# Altium PCB UIR_imitation.PcbDoc
Units mm, origin at the board's own origin, x right, y up, seen from the top; angles counter-clockwise.
Board outline 64.5 x 30.5 mm, 2 copper layers (Top Layer, Bottom Layer); 35 components, 13 nets, 92 pads, 18 vias.
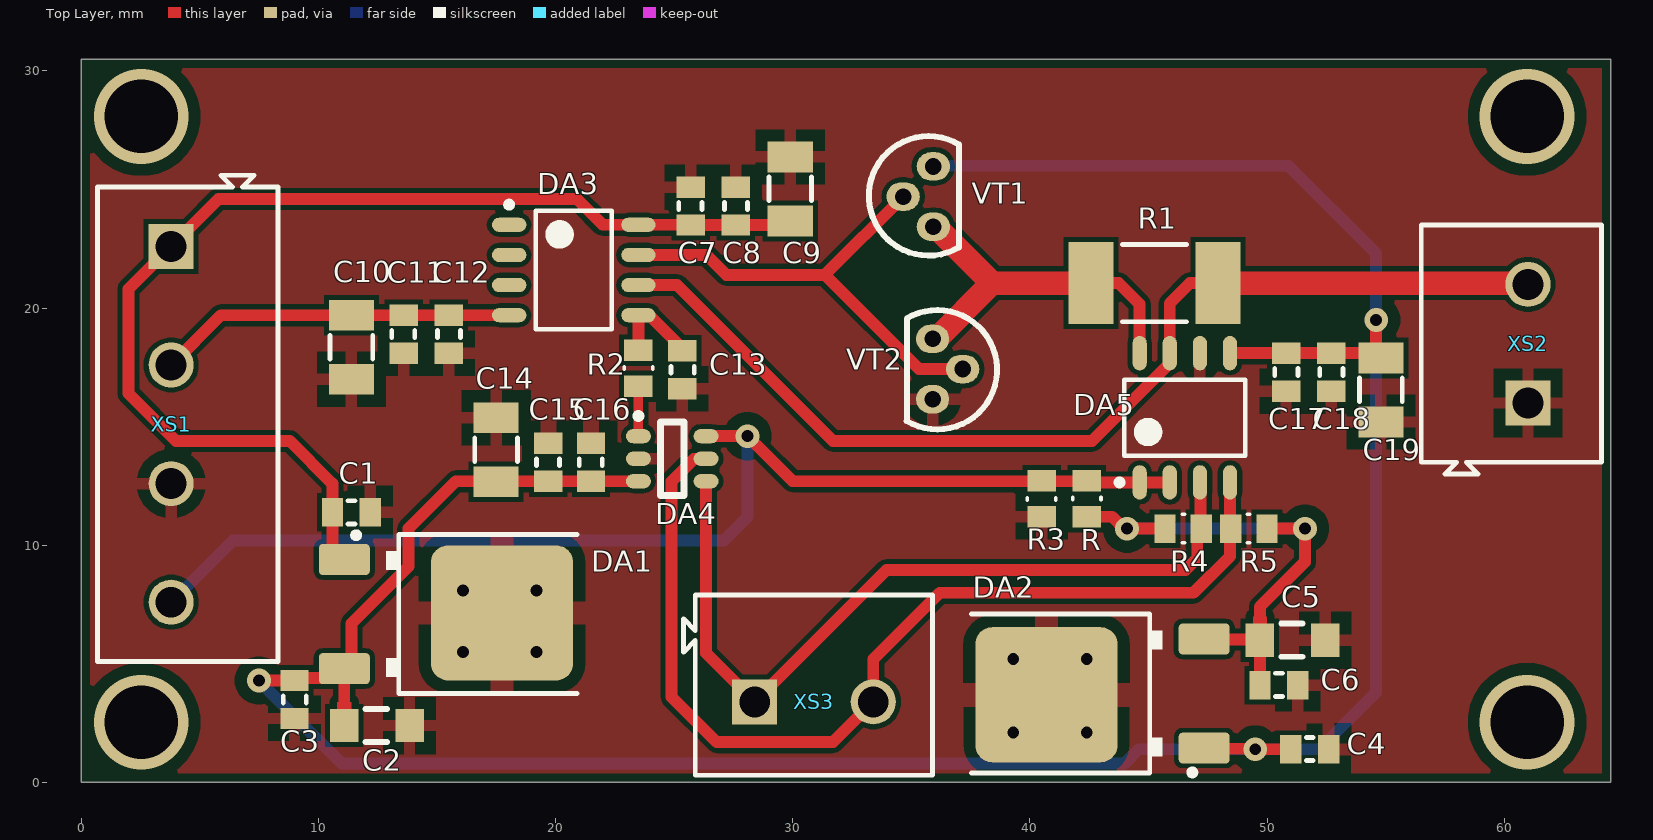
[diagram p0: Top Layer view]
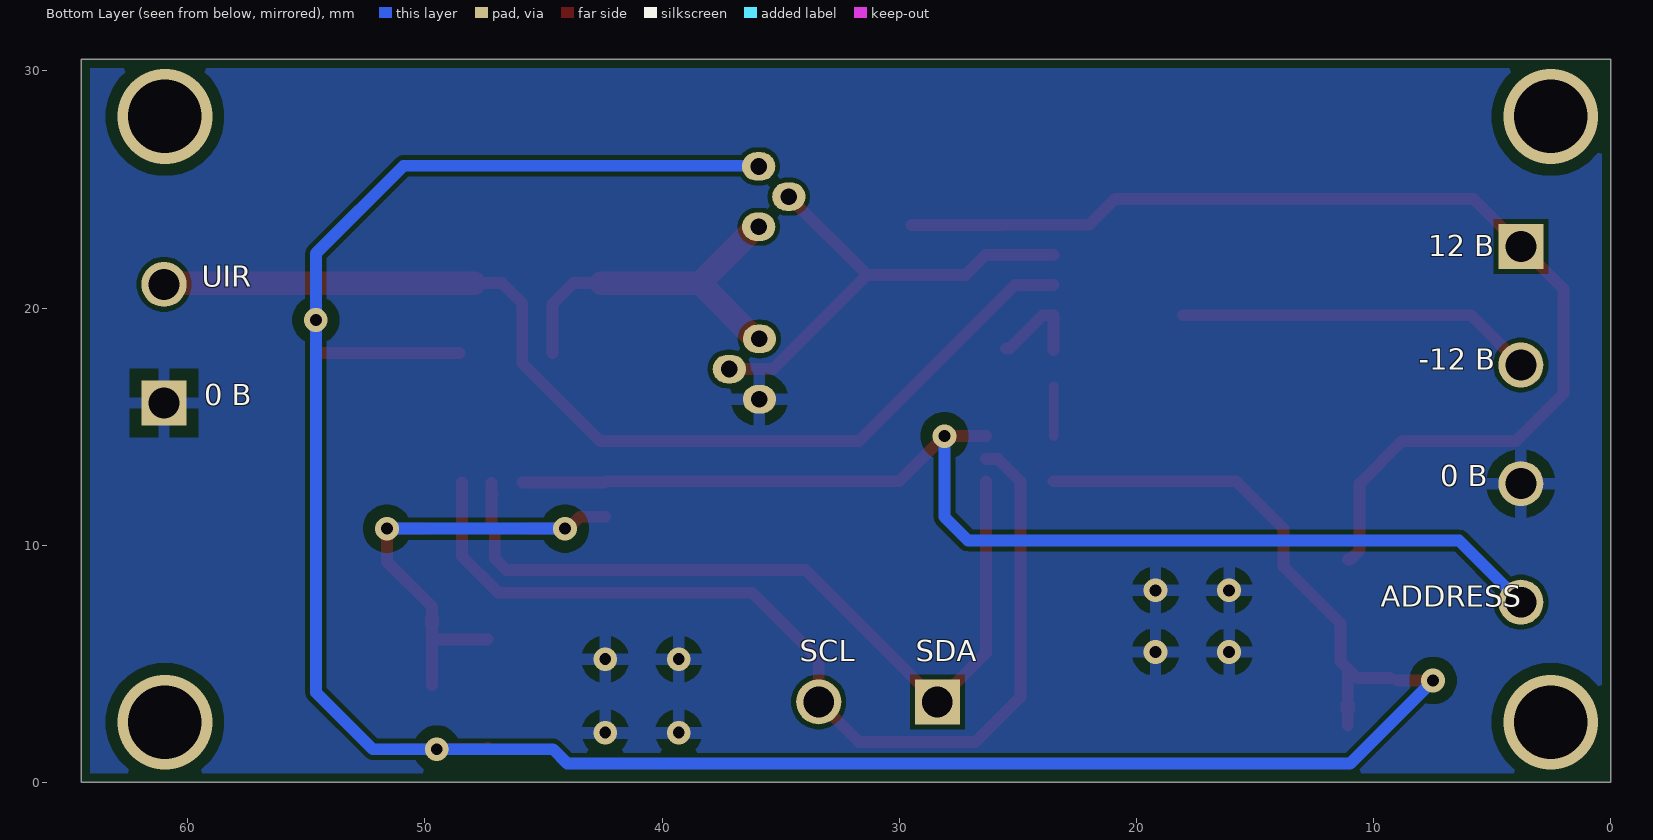
[diagram p1: Bottom Layer view, seen from below]
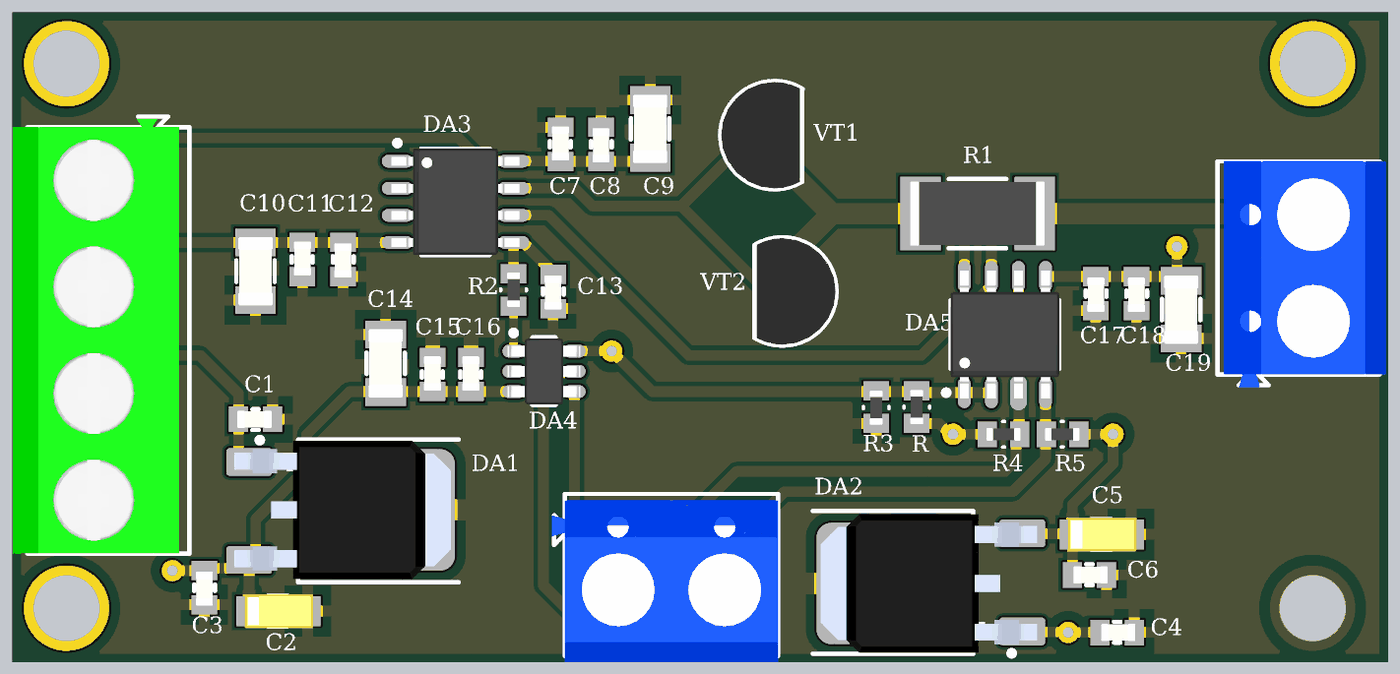
[diagram p2: 3D render of the assembled board from above, using the file's embedded part models]

## Layer stack, top to bottom
Top Solder: solder mask 0.0102, Solder Resist, Dk 3.5
Top Layer: signal copper 0.0356
Dielectric 1: dielectric 0.32, FR-4, Dk 4.8
Bottom Layer: signal copper 0.0356
Bottom Solder: solder mask 0.0102, Solder Resist, Dk 3.5

## Board outline
0,0 64.5,0 64.5,30.5 0,30.5

## Design rules (kind name [scope] priority, off if disabled: settings)
Clearance [All] p1: gap=0.254 ignorepadtopadclearanceinfootprint=FALSE except(0: Arc-SMDPad Arc-THPad Arc-Via Arc-Hole Track-SMDPad Track-THPad Track-Via Track-Hole SMDPad-Via SMDPad-Hole THPad-Hole Via-Hole Fill-Hole Poly-Hole Region-Hole Text-Hole; 0.2: Arc-Fill Arc-Poly Arc-Region Track-Fill Track-Poly Track-Region SMDPad-Fill SMDPad-Poly SMDPad-Region THPad-Fill THPad-Poly THPad-Region; 0.3: Fill-Fill Fill-Poly Fill-Region Poly-Poly Poly-Region Region-Region; 0.508: Via-Fill Via-Poly Via-Region)
Height [All] p1: minheight=0 maxheight=70 prefheight=35
PolygonConnect [All] p1: connectstyle=Relief reliefconductorwidth=0.5 reliefentries=4 polygonreliefangle="90 Angle" airgapwidth=0.5
RoutingVias [All] p1: holewidth=1.2 width=2.5 viastyle="Through Hole" minholewidth=0.5 minwidth=0.8 maxholewidth=3 maxwidth=5
SolderMaskExpansion [All] p1: expansion=0.102 istentingtop=FALSE
SupplyNets "Schematic Supply Nets_7" [InNet('5В')] p1: voltage=0.000
SupplyNets "Schematic Supply Nets_6" [InNet('-12В')] p2: voltage=0.000
SupplyNets "Schematic Supply Nets_5" [InNet('12В')] p3: voltage=0.000
SupplyNets "Schematic Supply Nets_4" [InNet('3В3')] p4: voltage=0.000
SupplyNets "Schematic Supply Nets_3" [InNet('GND')] p5: voltage=0.000
Width [All] p1: maxlimit=2.5 minlimit=0.15 preferedwidth=0.2
29 further rules are at their usual default settings.

## Components (designator, comment, footprint, x,y, rotation, side; value= is the part's Value field where it differs from the comment)
C1 "0.1 мкФ" "CAP 0603 3D" 12.2,11.4 r270 top
C2 "4.7 мкФ" "Tant A" 11.1,2.4 r90 top
C3 "0.1 мкФ" "CAP 0603 3D" 9,4.3 r0 top
C4 "0.1 мкФ" "CAP 0603 3D" 51,1.4 r90 top
C5 "4.7 мкФ" "Tant A" 49.7,6 r90 top
C6 "0.1 мкФ" "CAP 0603 3D" 49.7,4.1 r90 top
C7 "0.1 мкФ" "CAP 0603 3D" 25.7,23.5 r180 top
C8 "1 мкФ" "CAP 0603 3D" 27.6,25.1 r0 top
C9 "10 мкФ" "cap 1206 3D" 29.9,23.7 r180 top
C10 "10 мкФ" "cap 1206 3D" 11.4,19.675 r0 top
C11 "1 мкФ" "CAP 0603 3D" 13.6,18.1 r180 top
C12 "0.1 мкФ" "CAP 0603 3D" 15.5,19.7 r0 top
C13 "10 нФ" "CAP 0603 3D" 25.35,18.2 r0 top
C14 "10 мкФ" "cap 1206 3D" 17.5,12.7 r180 top
C15 "1 мкФ" "CAP 0603 3D" 19.7,12.7 r180 top
C16 "0.1 мкФ" "CAP 0603 3D" 21.5,12.7 r180 top
C17 "0.1 мкФ" "CAP 0603 3D" 50.8,18.1 r0 top
C18 "1 мкФ" "CAP 0603 3D" 52.7,18.1 r0 top
C19 "10 мкФ" "cap 1206 3D" 54.8,17.875 r0 top
DA1 "KF50BDT-TR" DPAK 11.15,9.35 r0 top
DA2 "KF33BDT-TR" DPAK 47.3,1.5 r180 top
DA3 "LM358" "SOIC-8 150mil" 20.775,21.605 r0 top
DA4 "MCP4725" SOT23-6 23.505,14.6 r0 top locked
DA5 "INA219" SOP-8 44.535,12.629 r90 top
R "10K" "Res_0603 3D" 42.4,12.724 r0 top
R1 "10 Ом" "Res_2512 3D" 42.6,21 r90 top
R2 "1.5 КОм" "Res_0603 3D" 23.5,18.224 r0 top
R3 "10K" "Res_0603 3D" 40.5,11.2 r180 top
R4 "4.7 КОм" "Res_0603 3D" 47.224,10.7 r270 top
R5 "4.7 КОм" "Res_0603 3D" 48.476,10.7 r90 top
VT1 "2n2222" "TO-92 EBC (2)" 35.93,23.43 r90 top
VT2 "2n2907" "TO-92 EBC (2)" 35.9,18.7 r270 top
XS1 "KF-301-4P" Degson_DG301-5.0-04P-1X 3.8,22.6 r270 top
XS2 "KF-301-2P" Degson_DG301-5.0-02P-1X 61,16 r90 top
XS3 "KF-301-2P" Degson_DG301-5.0-02P-1X 28.4,3.4 r0 top

## Footprints (in the part's own frame and the unit in brackets; to place one, negate y for a bottom-side part, rotate by r counter-clockwise, add the part's x,y. Pads: shape width x height; smd on the part's side, far side on the other; paste and mask are expansions set on the pad)
"CAP 0603 3D" [mm] "Конденсатор керамический ЧИП (SMD)"
  rect 1.2x0.9 smd: 1(0,0) 2(0,-1.6)
  silkscreen extent -0.48,-0.95 0.5,-0.65, body extent -0.4,-1.65 0.4,-0.05, height 0.86
"cap 1206 3D" [mm] "Конденсатор керамический ЧИП (SMD)"
  rect 1.9x1.3 smd: 1(0,0.025) 2(0,-2.675)
  silkscreen extent -0.9,-1.83 0.9,-0.83, body extent -0.8,-2.93 0.8,0.27, height 1.4
Degson_DG301-5.0-02P-1X [mm]
  rect 1.9x1.9 hole 1.3 mask+0.102: 1(0,0)
  round 1.9 hole 1.3 mask+0.102: 2(5,0)
  silkscreen extent -3,-3.1 7.5,4.5, body extent -3.1,-3.4 7.5,4.2, height 10
Degson_DG301-5.0-04P-1X [mm]
  rect 1.9x1.9 hole 1.3 mask+0.102: 1(0,0)
  round 1.9 hole 1.3 mask+0.102: 2(5,0) 3(10,0) 4(15,0)
  silkscreen extent -3,-3.1 17.5,4.5, body extent -2.91,-3.78 17.49,4.02, height 10.2
DPAK [mm] "TO-252,  CPT3,  KT-89"
  rrect25% 2.15x1.3 smd: 1(-0.05,0.05) 3(-0.05,-4.55)
  rrect25% 6x5.7 smd: 2(6.6,-2.2)
  silkscreen extent 0.33,-5.6 9.77,1.2, body extent -0.74,-5.45 9.4,1.05, height 2.43
"Res_0603 3D" [mm] "Резистор ЧИП (SMD)"
  rect 1.2x0.9 smd: 1(0,0) 2(0,-1.524)
  silkscreen extent -0.6,-0.8 0.6,-0.7, body extent -0.3,-1.55 0.3,0.05, height 0.63
"Res_2512 3D" [mm] "Резистор ЧИП (SMD)"
  rect 3.45x1.9 smd: 1(0.05,0.025) 2(0.05,-5.325)
  silkscreen extent -1.58,-4 1.67,-1.3, body extent -1.45,-5.8 1.55,0.5, height 0.7
"SOIC-8 150mil" [mm]
  oval 1.45x0.6 smd: 1(-2.725,1.905) 2(-2.725,0.635) 3(-2.725,-0.635) 4(-2.725,-1.905) 5(2.725,-1.905) 6(2.725,-0.635) 7(2.725,0.635) 8(2.725,1.905)
  silkscreen extent -2.85,-2.5 1.6,2.88, body extent -3,-2.5 3,2.5, height 1.75
SOP-8 [mm] "SOP, 8-Leads, Body 4,90x3,90mm, Pitch 1,27mm, IPC Medium Density"
  oval 1.45x0.6 smd: 1(0.021,-0.095) 2(0.021,-1.365) 4(0.021,-3.905) 5(5.471,-3.905) 6(5.471,-2.635) 7(5.471,-1.365) 8(5.471,-0.095)
  oval 1.45x0.6 smd paste+0.1: 3(0.021,-2.635)
  silkscreen extent -0.1,-4.55 4.35,0.88, body extent -0.25,-4.55 5.75,0.55, height 1.75
SOT23-6 [mm] "SOT23, 6-Leads, Body 2,90x2,70mm, Pitch 0,95mm, IPC Medium Density"
  oval 1.05x0.6 smd: 1(-0.005,0) 2(-0.005,-0.95) 3(-0.005,-1.9) 4(2.845,-1.9) 5(2.845,-0.95) 6(2.845,0)
  silkscreen extent -0.13,-2.5 1.92,0.97, body extent -0.28,-2.5 3.12,0.6, height 1.45
"Tant A" [mm] "Конденсатор тантал ЧИП (SMD)"
  rect 1.4x1.2 smd: 1(0,0) 2(0,-2.75)
  Top Layer region: 0.6,0.3 0.6,-0.3 1,-0.3 1,0.3
  silkscreen extent -0.7,-1.8 0.7,-0.9, body extent -0.8,-3 0.8,0.2, height 1.6
"TO-92 EBC (2)" [mm] "SC-43   2-5F1D   КТ-26"
  oval 1.2x1.4 hole 0.7: 1(1.27,1.27) 2(2.54,0) 3(0,0)
  silkscreen extent -1.22,-1.1 3.82,2.71, body extent -1.2,-1 3.8,2.7, height 11

## Part data
C1 C3 C4 C6 C7 C8 C9 C10 C11 C12 C13 C14 C15 C16 C17 C18 C19: library part C, "Конденсатор керамика"
C2 C5: library part "C T", "Конденсатор тантал"
DA1: library part MC78Mхх, "Линейный стабилизатор напряжения  5V"
DA2: library part MC78Mхх, "Линейный стабилизатор напряжения  5 - 15V"
DA3: library part MCP602
R R1 R2 R3 R4 R5: library part R, "Резисторы плёночные (SMD; МЛТ; С2-33Н; MP9xxx)"
VT1: library part "VT NPN", "Транзистор NPN"
VT2: library part "VT PNP", "Транзистор PNP"

## Via types
v1: diameter 1, hole 0.5, Top Layer to Bottom Layer, 14 vias
v2: diameter 4, hole 3.1, Top Layer to Bottom Layer, 4 vias

## Nets (pads, with @x,y where several pads share a name; then routed paths per layer and width w, separated by ;. In a path a pad name is that pad's centre, name@x,y a point inside that pad or via, vN(x,y) a via of type N, cw(c..) or ccw(c..) an arc to the next point about the centre after c; other vN are vias at no path point)
3В3: C5.1 C6.1 DA2.3 R4.2 R5.2 R.2 | length 22.4
  Top Layer w0.5: R.2 43.465,11.2 43.965,10.7 R4.2 ; DA2.3 47.375,6.025 49.675,6.025 C5.1 ; C6.1 C5.1 ; R5.2 v1(51.6,10.7) 51.6,9.3 49.7,7.4 C5.1
  Bottom Layer w0.5: v1(44.1,10.7) v1(51.6,10.7)
5В: C2.1 C3.1 C4.1 C14.1 C15.1 C16.1 C17.1 C18.1 C19.1 DA1.3 DA2.1 DA4.3 DA5.5 VT1.2 | length 123
  Top Layer w0.2: C14.1@17.4,12.6 C14.1@17.5,12.7
  Top Layer w0.5: v1(7.5,4.3) C3.1 ; C3.1@9.3,4.4 10.7,4.4 DA1.3 ; C2.1 DA1.3 ; C14.1@17.4,12.7 15.8,12.7 13.8,10.7 13.8,9.1 11.407,6.707 11.407,5.107 DA1.3 ; C14.1@17.5,12.7 C15.1 C16.1 DA4.3 ; DA2.1 47.375,1.425 49.475,1.425 v1(49.5,1.4) C4.1 ; DA5.5@48.54,18.1 C17.1 C18.1 54.6,18.1 v1(54.6,19.5)
  Bottom Layer w0.5: v1(7.5,4.3) 11,0.8 44,0.8 44.6,1.4 v1(49.5,1.4) 52.2,1.4 54.6,3.8 v1(54.6,19.5) 54.6,22.3 50.9,26 VT1.2@36.027,26
12В: C1.2 C7.1 C8.2 C9.1 DA1.1 DA3.8 XS1.1 | length 47.6
  Top Layer w0.2: C7.1@25.69,23.51 C7.1
  Top Layer w0.5: DA1.1 11,9.4 10.6,9.8 10.6,12.6 8.8,14.4 8.5,14.4 4,14.4 2,16.4 2,20.8 XS1.1 5.8,24.6 20.9,24.6 21.99,23.51 DA3.8 C7.1@25.69,23.51 ; C7.1 C8.2 C9.1@29.5,23.5
-12В: C10.1 C11.2 C12.1 DA3.4 XS1.2 | length 15.1
  Top Layer w0.5: XS1.2 5.9,19.7 11.5,19.7 13.5,19.7 C12.1 DA3.4
ADDRESS: DA4.6 DA5.1 DA5.2 R3.2 R.1 XS1.4 | length 49.5
  Top Layer w0.5: DA4.6 v1(28.1,14.6) 30,12.7 R.1@42.4,12.7 ; R.1@42.45,12.65 DA5.1 DA5.2
  Bottom Layer w0.5: XS1.4 6.4,10.2 27.1,10.2 28.1,11.2 v1(28.1,14.6)
GND: C1.1 C2.2 C3.2 C4.2 C5.2 C6.2 C7.2 C8.1 C9.2 C10.2 C11.1 C12.2 C13.2 C14.2 C15.2 C16.2 C17.2 C18.2 C19.2 DA1.2 DA2.2 DA4.2 DA5.6 R3.1 VT2.2 XS1.3 XS2.1
  other v1: 39.3,2.1 42.4,2.1 39.3,5.2 42.4,5.2 16.1,5.5 19.2,5.5 16.1,8.1 19.2,8.1
NEGATIVE_FEEDBACK: DA3.6 DA5.7 R1.2 XS2.2 | length 44.5
  Top Layer w0.5: DA3.6 25.13,20.97 31.7,14.4 42.625,14.4 45.9,17.675 DA5.7 45.9,20.2 46.75,21.05 R1.2
  Top Layer w1: R1.2 XS2.2@61,21.05
NetC13_1: C13.1 DA3.5 R2.1 | length 4.1
  Top Layer w0.5: R2.1 DA3.5 23.95,19.7 25.35,18.3 C13.1@25.5,18.3
NetDA3_7: DA3.7 VT1.1 VT2.1 | length 20.3
  Top Layer w0.5: DA3.7 26.36,22.24 27.2,21.4 31.36,21.4 ; VT1.1 31.36,21.4 ; VT2.1 35.33,17.43 31.36,21.4
NetDA4_1: DA4.1 R2.2 | length 2.1
  Top Layer w0.4: DA4.1 R2.2
NetDA5_8: DA5.8 R1.1 VT1.3 VT2.3 | length 15.3
  Top Layer w0.5: R1.1 43.75,21.05 44.63,20.17 DA5.8
  Top Layer w1: VT1.3@36.03,23.43 38.41,21.05 ; VT2.3@36.06,18.7 38.41,21.05 ; R1.1 38.41,21.05
SCL: DA4.5 DA5.4 R5.1 XS3.2 | length 42.7
  Top Layer w0.5: DA4.5 26.331,13.631 25.831,13.631 24.9,12.7 24.9,3.6 26.8,1.7 31.7,1.7 XS3.2 33.4,5.2 36.2,8 46.9,8 48.44,9.54 DA5.4
SDA: DA4.4 DA5.3 R4.1 XS3.1 | length 35.1
  Top Layer w0.2: DA5.3@46.985,12.148 47.17,12.333 DA5.3
  Top Layer w0.5: DA4.4 26.35,5.45 XS3.1 33.955,8.955 46.555,8.955 47.057,9.457 47.057,10.557 47.2,10.7 DA5.3@47.2,12.62
pads on no net: DA3.1 DA3.2 DA3.3
copper on no net:
  other v2: 2.54,2.54 60.96,2.54 2.54,28.08 60.96,28.08

## Polygon pours and split planes (outlines as drawn)
GND on Top Layer "GND_L01_P000" (solid, remove dead copper, pour order 0): 0.4,0.4 64.1,0.4 64.1,30.1 0.4,30.1
GND on Bottom Layer "GND_L02_P001" (solid, remove dead copper, pour order 1): 0.4,0.4 64.1,0.4 64.1,30.1 0.4,30.1

## Silkscreen, mask and mechanical layers (free items; w line width, h text height)
Bottom Overlay:
  text "12 В" at 7.714,21.9 h1.52
  text "UIR" at 59.4,20.6 h1.52
  text "-12 В" at 8.1,17.1 h1.52
  text "0 В" at 59.3,15.6 h1.52
  text "0 В" at 7.2,12.2 h1.52
  text "ADDRESS" at 9.71,7.121 h1.52
  text "SDA" at 29.308,4.821 h1.52
  text "SCL" at 34.208,4.821 h1.52
Рамка:
  lines w0.254: 0,0 64.5,0 64.5,30.5 0,30.48 0,0